# Altium PCB MCU103A.PcbDoc (part 4 of 6)
Units mm, origin at the board's own origin, x right, y up, seen from the top; angles counter-clockwise.
Board outline 58.42 x 139.7 mm, 4 copper layers (Top Signal, GND, PWR, Bottom Signal), stack 1.565 mm thick; 256 components, 210 nets, 1058 pads, 772 vias.
Unrouted connection lines stored in the file: 237.
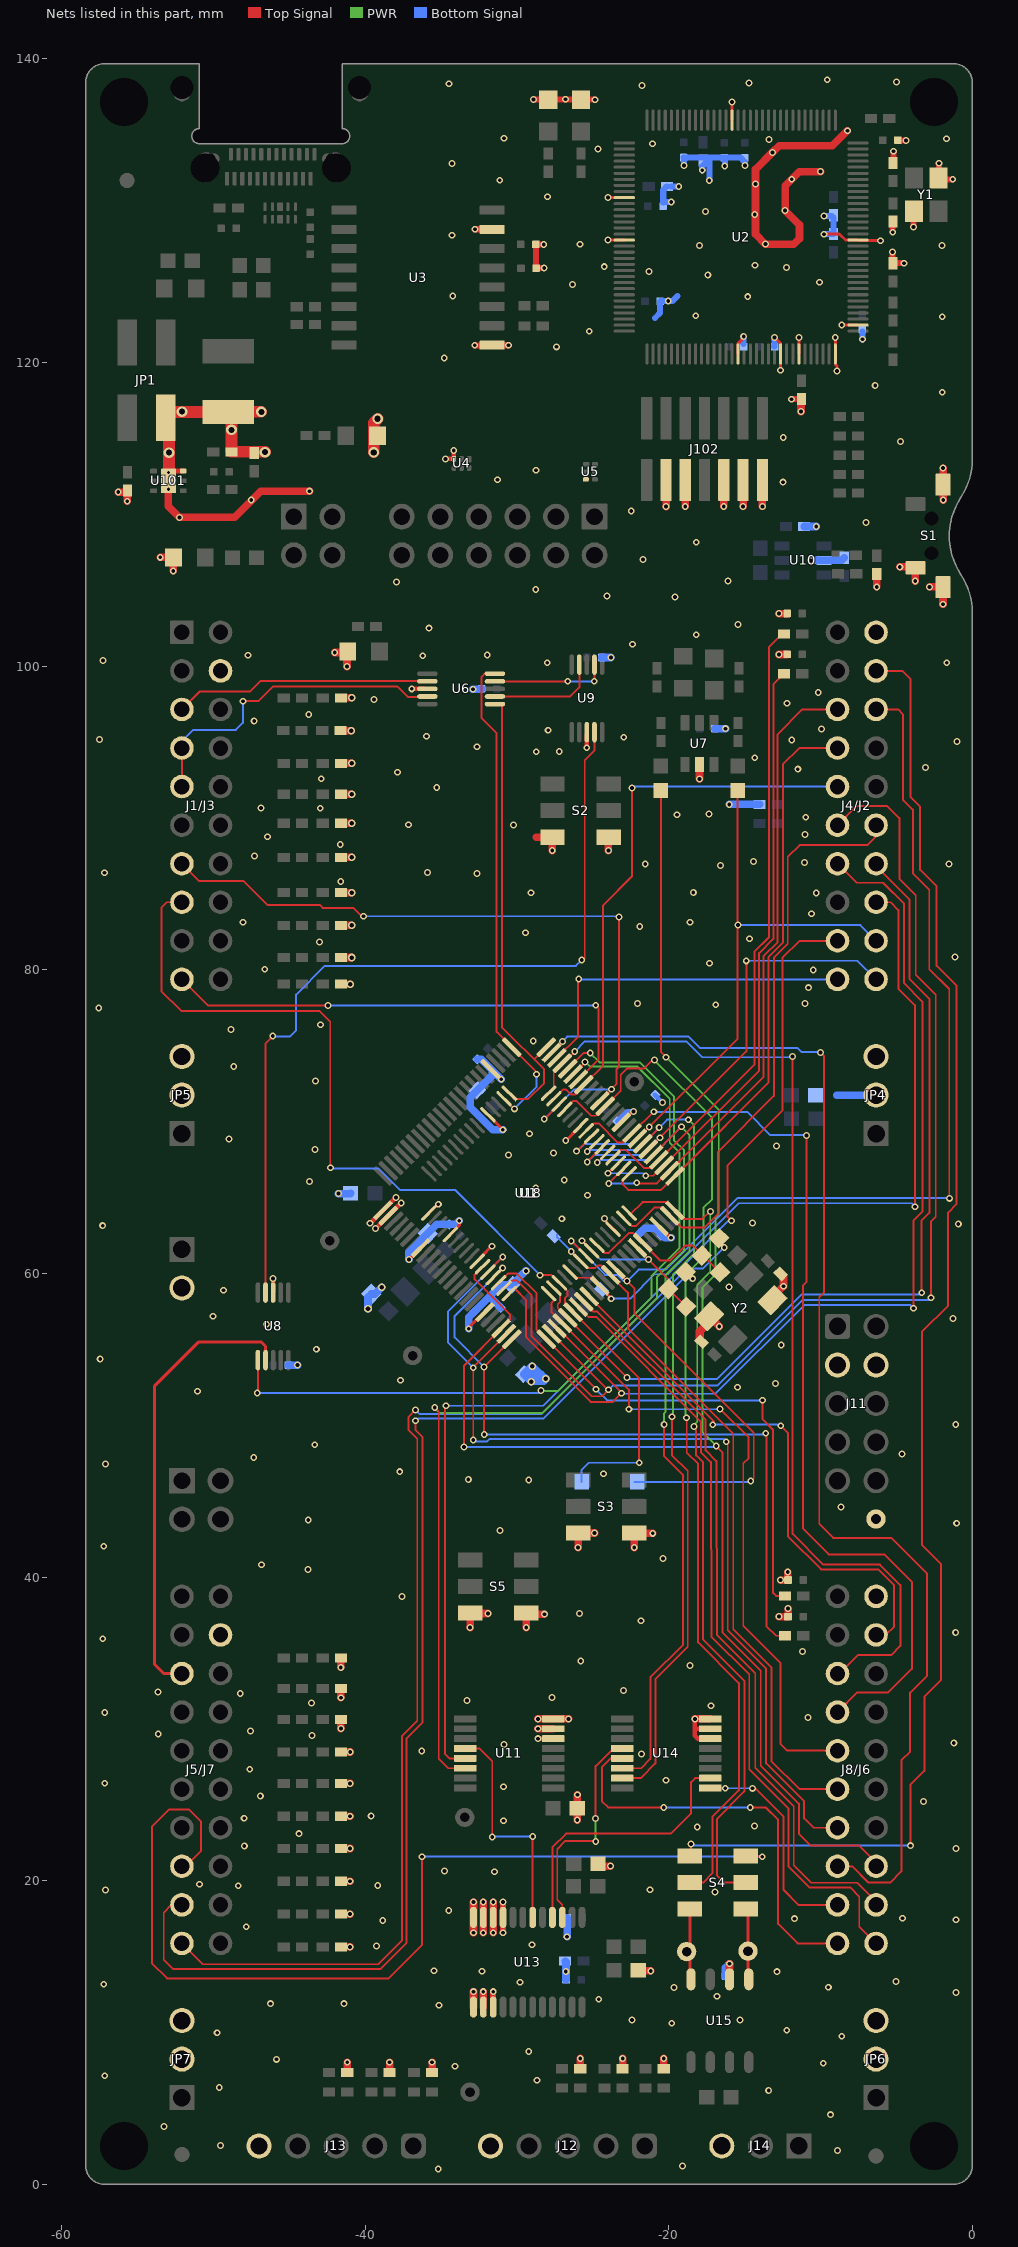
[diagram p5: the nets of this part, all layers, seen from the top]

## Via types
v1: diameter 0.45, hole 0.25, Top Signal to Bottom Signal, tented both sides, 726 vias
v2: diameter 0.5, hole 0.3, Top Signal to Bottom Signal, tented both sides, 22 vias
v3: diameter 0.7, hole 0.4, Top Signal to Bottom Signal, tented both sides, 17 vias
v4: diameter 0.4, hole 0.2, Top Signal to Bottom Signal, tented both sides, 5 vias
v5: diameter 0.5, hole 0.2, Top Signal to Bottom Signal, 2 vias

## Nets (pads, with @x,y where several pads share a name; then routed paths per layer and width w, separated by ;. In a path a pad name is that pad's centre, name@x,y a point inside that pad or via, vN(x,y) a via of type N, cw(c..) or ccw(c..) an arc to the next point about the centre after c; other vN are vias at no path point) (continued)
GND: C1.1 C2.1 C6.1 C7.2 C8.2 C9.1 C10.1 C11.1 C12.1 C13.1 C14.1 C15.2 C16.2 C17.1 C18.1 C19.1 C20.1 C21.1 C22.1 C23.1 C24.2 C25.2 C26.2 C27.2 C28.2 C29.2 C30.2 C31.2 C32.2 C33.2 C34.2 C35.2 C36.2 C37.2 C38.2 C39.2 C40.2 C41.2 C42.2 C43.2 C44.1 C45.2 C46.1 C50.1 C51.1 C52.1 C53.1 C54.1 C55.1 C56.2 C57.2 C58.1 C59.2 C60.1 C61.2 C62.2 C63.2 C64.2 C65.1 C66.1 C67.2 C68.2 C69.2 C70.2 C71.2 C72.2 C73.2 C74.2 C75.2 C76.2 C77.2 C78.2 C81.1 C82.1 C83.1 C84.1 C100.2 C103.2 C104.1 J1/J3.22 J4/J2.20 J5/J7.62 J8/J6.60 J11.3 J11.4 J12.5 J13.5 J14.3 J15.2 J102.3 J102.5 J102.9 J102.11 J102.13 JP1.4 JP4.2 JP4.3 JP5.2 JP5.3 JP6.2 JP6.3 JP7.2 JP7.3 LED0.1 LED1.1 LED2.2 LED3.2 LED6.1 R41.2 R52.1 R53.2 R67.1 R68.1 R83.2 R102.1 S1.1 S1.2 S1.3 S2.3 S2.6 S3.1 S3.4 S5.1 S5.4 TP6.1 U1.5 U1.26 U1.27 U1.33 U1.45 U1.72 U1.86 U2.10 U2.17 U2.48 U2.55 U2.58 U2.64 U2.66 U2.80 U2.114 U3.9 U3.15 U4.3 U5.3 U6.3 U7.2 U8.3 U9.3 U10.2 U11.6 U11.7 U11.8 U13.9 U13.10 U13.11 U13.12 U13.13 U13.14 U13.15 U14.6 U14.7 U14.8 U15.2 U18.5 U18.17 U18.21 U18.26 U18.45 U18.58 U101.3 U101.7@-52.959,112.21 Y1.2 Y1.4 Y2.2 Y2.4 | length 241.4
  Top Signal w0.2: v1@-37.069,60.969 U1.33@-36.352,61.686 ; U18.17@-35.892,63.899 v1@-35.175,64.616 ; U18.21@-34.478,62.485 -34.478,62.494 -33.805,63.167 v1(-33.805,63.481) ; v1@-33.234,56.389 U1.45@-32.217,57.406 ; U18.26@-32.39,61.076 v1@-31.656,61.81 ; U1.5@-31.756,73.494 -31.059,72.797 v1(-31.037,72.797) ; U18.5@-31.74,70.296 -30.933,69.489 v1(-30.933,69.468) ; v1(-26.788,68.769) -26.764,68.769 U18.58@-25.996,69.537 ; v1@-24.365,63.632 U18.45@-23.456,62.723 ; v1(-24.011,128.07) U2.17@-22.935,128.07 ; v1(-24.011,130.87) U2.10@-22.935,130.87 ; U1.86@-22.77,70.298 -22.386,70.682 v1(-22.322,70.682) ; U1.72@-20.654,63.1 v1@-19.938,62.383 ; U2.114@-15.835,135.97 v1(-15.835,137.16) ; U2.48@-15.435,120.57 -15.435,121.28 -15.071,121.644 v1(-15.071,121.725) ; v1(-13.033,121.661) -13.033,121.656 -12.897,121.52 -12.89,121.52 -12.635,121.265 U2.55@-12.635,120.57 v1(-12.635,119.494) ; U2.58@-11.435,120.57 v1(-11.435,121.646) ; v1(-9.779,128.46) -8.751,128.46 -8.361,128.07 U2.80@-7.535,128.07 -7.505,128.04 -6.069,128.04 v1(-6.06,128.031) ; v1(-9.035,121.646) U2.64@-9.035,120.57 -9.035,119.896 -8.916,119.777 v1(-8.916,119.439) ; v1(-8.611,122.47) U2.66@-7.535,122.47
  Top Signal w0.3: U101.7@-52.959,112.21 -52.959,112.477 -52.92,112.516 -52.576,112.86 U101.3@-51.984,112.86 ; U8.3@-46.064,58.749 U8.3@-46.064,58.749 v1(-46.063,59.677) ; v1(-39.676,63.311) U1.26@-38.827,64.161 v1(-37.978,65.01) ; v1(-39.323,62.958) U1.27@-38.474,63.807 v1(-37.624,64.656) ; v1(-36.932,98.513) U6.3@-36.071,98.513 ; v1(-34.703,113.654) -34.164,113.654 U4.3@-34.153,113.665 ; U4.3@-34.164,113.676 v1(-34.164,114.215) ; v1(-28.625,29.365) U11.6@-27.612,29.365 ; v1(-25.401,94.631) U9.3@-25.401,95.492 ; v1(-18.278,30.665) -18.278,30.069 -18.224,30.015 ; U14.6@-17.265,29.365 -18.094,29.365 -18.28,29.551 -18.28,30.015 U14.7@-17.265,30.015
  Top Signal w0.4: v1(-32.78,121.14) U3.9@-32.276,121.14 ; v1(-32.76,128.784) U3.15@-31.608,128.784 ; U13.15@-31.568,11.687 v1(-31.568,12.7) ; U3.9@-31.056,121.144 v1(-30.552,121.144) ; v1(-30.918,16.575) U13.9@-30.918,17.588 ; U13.9@-30.918,17.588 v1(-30.918,18.6) ; v1(-28.908,137.322) LED3.2@-28.404,137.322 ; C1.1@-28.754,127.646 -28.754,126.241 C2.1@-28.735,126.222 ; C1.1@-28.754,127.773 v1(-28.237,127.773) ; C2.1@-28.715,126.24 v1(-28.211,126.24) ; LED3.2@-27.691,137.344 LED2.2@-26.3,137.344 ; LED2.2@-25.359,137.317 v1(-24.855,137.317) ; v1(-11.924,117.59) R68.1@-11.42,117.59 ; R67.1@-5.266,126.78 v1(-5.266,127.284) ; v1(-5.256,128.59) C63.2@-5.256,129.094 ; C62.2@-5.206,133.415 v1(-5.206,133.919) ; R67.1@-5.012,126.549 v1(-4.508,126.549) ; C50.1@-4.888,134.626 v1(-4.384,134.626) ; v1(-3.877,128.937) Y1.4@-3.877,129.441 ; Y1.2@-2.213,132.633 v1(-2.213,133.137) ; Y1.2@-1.803,132.074 v1(-1.299,132.074)
  Top Signal w0.5: v1(-56.27,111.47) -55.674,111.47 v1(-55.674,110.874) ; v1(-53.503,107.174) LED6.1@-52.642,107.174 ; U101.7@-52.959,112.21 -52.959,110.53 v1(-52.232,109.803) -48.604,109.803 -46.873,111.534 -46.872,111.533 v1(-43.668,111.533) ; v1(-52.642,106.279) LED6.1@-52.642,107.14 ; v1(-42.006,100.908) LED1.1@-41.213,100.908 ; C39.2@-41.632,95.758 v2(-40.927,95.758) ; C25.2@-41.603,15.653 C25.2@-41.599,15.649 v1(-40.992,15.649) ; C38.2@-41.603,17.815 C38.2@-41.599,17.811 v1(-40.992,17.811) ; C75.2@-41.603,19.974 C75.2@-41.599,19.97 v1(-40.992,19.97) ; C40.2@-41.603,22.133 C40.2@-41.599,22.129 v1(-40.992,22.129) ; C29.2@-41.603,24.261 C29.2@-41.599,24.257 v1(-40.992,24.257) ; C27.2@-41.603,26.42 C27.2@-41.599,26.416 ; v1(-41.603,34.06) -41.603,34.667 C78.2@-41.599,34.671 ; C35.2@-41.599,28.479 C35.2@-41.595,28.483 ; C35.2@-41.599,28.487 C35.2@-41.595,28.483 ; v1(-41.599,30.031) C37.2@-41.599,30.638 C37.2@-41.595,30.642 ; v1(-41.599,32.063) C77.2@-41.599,32.67 C77.2@-41.595,32.674 ; C36.2@-41.599,80.814 v2(-40.894,80.814) ; C76.2@-41.599,82.93 v2(-40.894,82.93) ; C30.2@-41.599,85.09 v2(-40.894,85.09) ; C32.2@-41.599,87.411 v2(-40.894,87.411) ; C31.2@-41.599,89.662 v2(-40.894,89.662) ; C34.2@-41.599,91.567 v2(-40.894,91.567) ; C26.2@-41.599,93.599 v2(-40.894,93.599) ; C28.2@-41.599,97.917 v2(-40.894,97.917) ; C27.2@-41.595,26.42 C27.2@-41.599,26.416 ; C33.2@-41.565,79.045 -41.561,79.049 v2(-40.979,79.049) ; v1(-41.197,99.982) -41.197,100.892 LED1.1@-41.213,100.908 ; C73.2@-41.183,7.366 v1(-41.183,8.045) ; LED1.1@-41.156,100.965 LED1.1@-41.213,100.908 ; v1(-40.992,26.416) C27.2@-41.599,26.416 ; v1(-40.988,28.483) C35.2@-41.595,28.483 ; C72.2@-38.389,7.366 v1(-38.389,8.045) ; C71.2@-35.595,7.366 v1(-35.595,8.045) ; v1(-33.087,36.68) S5.4@-33.087,37.633 ; U13.13@-32.868,11.687 v1(-32.868,12.7) ; v1(-32.868,16.575) U13.12@-32.868,17.588 ; U13.12@-32.868,17.588 v1(-32.868,18.6) ; S5.4@-32.868,37.606 v1(-31.915,37.606) ; U13.14@-32.218,11.687 v1(-32.218,12.7) ; U13.11@-32.218,17.588 v1(-32.218,18.6) ; U13.11@-32.218,17.588 v1(-32.218,16.575) ; v1(-31.568,16.575) U13.10@-31.568,17.588 ; U13.10@-31.568,17.588 v1(-31.568,18.6) ; v1(-29.387,36.68) S5.1@-29.387,37.633 ; S5.1@-29.146,37.565 v1(-28.193,37.565) ; -28.73,88.734 S2.3@-27.869,88.734 ; v1(-28.625,30.665) U11.8@-27.612,30.665 ; v1(-28.625,30.015) U11.7@-27.612,30.015 ; v1(-27.678,87.863) -27.678,88.724 S2.3@-27.661,88.741 ; U11.8@-27.612,30.665 v1(-26.6,30.665) ; v1(-26.029,24.009) -26.029,24.785 R41.2@-26.036,24.792 -26.023,24.805 v1(-26.023,25.672) ; v1(-25.973,41.949) S3.4@-25.973,42.902 ; S3.4@-25.84,42.909 v1(-24.887,42.909) ; C70.2@-25.835,7.62 v1(-25.835,8.299) ; R52.1@-24.665,21.114 -24.523,20.972 v1(-23.849,20.972) ; v1(-23.978,87.863) S2.6@-23.978,88.724 ; C69.2@-23.041,7.62 v1(-23.041,8.299) ; v1(-22.273,41.949) S3.1@-22.273,42.902 ; R53.2@-22.016,14.097 -21.986,14.127 -21.926,14.067 v1(-21.19,14.067) ; S3.1@-22.014,42.888 v1(-21.061,42.888) ; C68.2@-20.33,7.62 v1(-20.33,8.299) ; J102.3@-20.188,112.265 -20.182,112.259 v1(-20.182,110.521) ; v1(-18.918,110.527) J102.5@-18.918,112.265 ; v1(-18.278,30.665) U14.8@-17.265,30.665 ; v1(-17.982,92.58) U7.2@-17.982,93.533 ; C41.2@-17.845,55.508 -17.98,55.643 -17.98,56.181 Y2.4@-17.16,57.001 ; Y2.4@-17.348,57.189 Y2.4@-17.16,57.001 ; v1(-16.674,56.515) Y2.4@-17.16,57.001 ; v1(-16.378,110.527) J102.9@-16.378,112.265 ; U15.2@-16.005,13.512 v1(-16.005,14.543) ; v1(-15.108,110.527) J102.11@-15.108,112.265 ; v1(-13.838,110.527) J102.13@-13.838,112.265 ; Y2.2@-13.122,58.489 v1(-12.448,59.163) -12.448,59.794 C42.2@-12.634,59.98 ; v1(-12.751,100.772) C83.1@-12.209,100.772 ; v1(-12.751,103.466) C84.1@-12.209,103.466 ; v1(-12.744,37.405) C81.1@-12.148,37.405 -12.141,37.412 v1(-12.141,37.928) ; v1(-12.641,39.805) C82.1@-12.157,39.805 ; v1(-12.164,40.333) -12.164,39.812 C82.1@-12.157,39.805 ; C82.1@-12.148,39.814 C82.1@-12.157,39.805 ; v1(-11.293,116.772) R68.1@-11.293,117.633 ; v1(-10.01,132.58) -11.394,132.58 v1(-11.9,132.074) -12.34,131.634 v1(-12.34,130.018) -11.394,129.072 -11.394,128.166 -11.775,127.785 -13.615,127.785 v1(-13.64,127.81) -14.29,128.46 v1(-14.29,131.76) -14.29,132.726 v1(-13.176,133.84) -12.736,134.28 -9.225,134.28 v1(-8.235,135.27) ; v1(-6.305,105.227) C7.2@-6.305,106.081 ; v1(-4.784,106.546) S1.3@-3.923,106.546 ; v1(-3.765,105.607) S1.3@-3.765,106.468 ; v1(-2.826,105.227) S1.1@-1.965,105.227 ; v1(-1.943,104.084) S1.1@-1.943,104.945 ; S1.2@-1.935,112.193 v1(-1.935,113.054) ; v1(-1.925,110.95) S1.2@-1.925,111.811
  Top Signal w0.762: U101.7@-52.92,112.516 v3(-52.92,114.068) -52.92,116.156 JP1.4@-53.136,116.372 -52.763,116.745 C104.1@-49.022,116.745 ; v3(-46.838,116.752) -49.015,116.752 C104.1@-49.022,116.745 ; v3@-46.571,114.122 R102.1@-48.803,114.122 -48.803,116.526 C104.1@-49.022,116.745 ; v3(-39.438,114.089) -39.438,116.031 -39.174,116.294 v3(-39.184,116.304)
  Bottom Signal w0.2: v1@-26.775,68.756 v1@-26.775,68.758 ; v1@-22.405,70.598 v1(-22.322,70.682)
  Bottom Signal w0.3: C23.1@-23.398,70.02 -22.737,70.682 v1(-22.322,70.682) ; C13.1@-20.936,71.787 -20.417,71.267 v1(-20.417,71.257)
  Bottom Signal w0.4: -20.91,122.94 -20.571,123.279 C55.1@-20.571,124.031 ; C55.1@-20.546,124.056 v1(-20.042,124.056) -19.764,124.056 -19.44,124.38 ; -20.369,130.558 -20.369,131.366 C57.2@-20.127,131.608 ; -20.344,130.583 v1(-19.84,130.583) ; C57.2@-19.847,131.591 v1(-19.343,131.591) ; C52.1@-19.03,133.508 -15.291,133.508 ; v1(-19.005,132.979) C52.1@-19.005,133.483 ; v1(-17.797,132.669) -17.797,132.933 C61.2@-17.491,133.239 ; v1(-17.332,132.001) -17.332,133.434 -17.308,133.458 ; v1(-16.311,132.954) C60.1@-16.311,133.458 ; -15.266,133.483 -14.986,133.203 v1(-14.986,132.979) ; C54.1@-15.071,121.221 v1(-15.071,121.725) ; C53.1@-13.056,121.063 -13.033,121.086 v1(-13.033,121.661) ; v1(-9.779,128.46) C56.2@-9.275,128.46 ; v1(-9.779,129.661) -9.275,129.661 -9.164,129.55 C56.2@-9.164,128.467 ; v1(-7.251,121.537) C66.1@-7.251,122.041
  Bottom Signal w0.5: C45.2@-45.067,53.971 v1(-44.451,53.971) ; v1(-41.762,65.266) -40.972,65.266 C24.2@-40.96,65.278 ; v2(-39.816,57.672) -39.816,58.433 C16.2@-39.598,58.652 -39.376,58.652 v2(-38.921,59.107) ; v1(-37.111,60.932) -37.111,61.407 C15.2@-35.876,62.643 -35.272,63.246 -34.454,63.246 C14.1@-34.448,63.24 -34.046,63.24 v1(-33.805,63.481) ; v1(-33.177,56.363) -33.177,57.128 C10.1@-32.792,57.513 -31.832,58.473 ; v1(-32.908,98.486) -32.37,98.486 C43.2@-32.335,98.521 ; C11.1@-32.621,74.115 -32.355,74.115 v1(-31.037,72.797) ; C20.1@-31.548,73.229 -31.548,73.144 C9.1@-32.609,72.083 -33.081,71.61 -33.081,70.955 -31.594,69.468 v1(-30.933,69.468) ; C22.1@-31.08,57.744 -31.809,58.473 -31.832,58.473 ; v1(-29.41,60.176) C19.1@-30.328,59.259 -31.047,59.259 -31.832,58.473 ; v2(-28.11,53.061) -28.42,53.372 -28.473,53.372 ; v2@-28.09,53.073 -28.248,52.915 -29.038,52.915 v2(-29.073,52.88) -29.073,52.889 C18.1@-29.556,53.372 ; C67.2@-26.828,14.711 -26.77,14.653 C65.1@-26.77,13.475 ; v1(-26.699,16.317) C64.2@-26.699,17.564 ; C46.1@-24.406,100.577 v1(-23.818,100.577) ; C21.1@-21.957,62.626 -21.597,62.986 -20.885,62.986 -20.253,62.354 v1(-19.848,62.354) ; C44.1@-16.975,95.897 -16.968,95.89 v1(-16.261,95.89) ; C74.2@-16.264,13.724 -16.264,14.284 v1(-16.005,14.543) ; v1(-16.024,90.902) C17.1@-14.018,90.902 ; C8.2@-11.089,109.204 v1(-10.286,109.204) ; v1(-10.662,106.97) U10.2@-9.787,106.97 -8.62,106.97 C6.1@-8.446,107.144 ; -8.952,71.755 JP4.2@-6.35,71.755 ; C18.1@-29.556,53.372 -28.473,53.372 ; C18.1@-29.556,53.372 -29.028,53.899 v2(-29,53.899) -28.473,53.372
  other v1: -35.182,1.022 -19.095,1.21 -8.89,2.234 -49.53,2.572 -53.243,3.821 -9.347,4.599 -13.424,6.193 -49.611,6.393 -28.681,6.861 -57.15,7.163 -34.089,7.786 -9.831,7.983 -45.836,8.242 -29.221,8.766 -8.61,9.758 -49.75,9.994 -12.236,10.154 -19.802,10.614 -22.421,10.84 -15.32,10.84 -35.134,11.8 -46.246,11.91 -41.402,11.91 -24.612,12.2 -16.831,12.402 -1.075,12.651 -19.651,12.981 -9.493,12.988 -57.219,13.183 -29.804,13.325 -5.033,13.366 -12.874,14.017 -32.314,14.043 -26.783,14.036 -35.467,14.076 -39.251,15.699 -29.008,15.795 -47.837,16.974 -38.839,17.386 -1.092,17.432 -11.719,17.508 -4.603,17.54 -34.499,18.047 -16.96,19.255 -57.095,19.403 -21.244,19.412 -48.362,19.673 -39.17,19.702 -50.91,19.77 -31.479,20.6 -34.773,20.655 -1.09,22.134 -47.959,22.294 -44.361,23.107 -18.127,23.55 -14.357,23.613 -30.891,23.952 -47.971,24.124 -39.607,24.267 -3.221,25.22 -46.906,25.585 -30.891,26.196 -57.157,26.431 -20.178,26.627 -47.606,27.35 -21.794,28.35 -36.275,28.558 -30.847,28.984 -1.227,29.083 -43.507,29.567 -53.627,29.674 -47.55,29.87 -10.832,30.762 -57.157,31.095 -17.226,31.532 -43.536,31.708 -33.3,31.88 -27.688,32.078 -48.23,32.331 -53.655,32.446 -22.98,32.541 -18.615,34.191 -25.801,34.475 -11.203,35.114 -57.281,35.947 -1.107,36.349 -21.833,37.13 -25.878,37.613 -37.581,38.734 -43.768,40.514 -46.829,40.814 -20.384,41.235 -57.219,42.042 -31.116,43.066 -1.041,43.552 -43.752,43.773 -8.667,44.62 -29.229,46.404 -33.205,46.433 -24.303,46.814 -37.723,46.951 -57.095,47.453 -47.335,47.882 -4.641,48.108 -43.324,48.728 -1.099,50.058 -51.04,52.242 -15.486,52.511 -12.979,52.748 -37.67,52.972 -57.456,54.367 -43.217,55.01 -12.593,55.296 -46.503,56.656 -1.282,57.034 -50.018,57.187 -49.34,58.905 -16.028,59.115 -31.642,61.797 -57.292,63.154 -0.93,63.255 -14.482,63.329 -27.046,63.612 -24.236,63.628 -35.181,64.565 -25.358,65.158 -28.77,65.655 -43.665,66.069 -26.886,66.153 -30.565,67.806 -27.597,67.948 -43.308,68.176 -12.91,68.402 -48.971,68.863 -29.179,69.21 -43.271,72.687 -48.661,73.646 -28.93,75.326 -48.83,76.083 -42.948,76.39 -57.55,77.489 -16.912,77.704 -22.056,77.779 -11.039,77.784 -10.808,78.831 -10.485,79.991 -46.613,80.046 -17.314,80.441 -1.149,80.844 -43.013,81.837 -14.681,82.055 -29.448,82.45 -21.915,82.85 -48.056,83.134 -18.608,83.137 -10.611,83.701 -10.286,85.068 -29.084,85.079 -18.385,85.094 -41.604,85.813 -32.641,86.346 -57.175,86.397 -35.889,86.416 -16.596,86.886 -1.547,86.967 -21.555,86.985 -11.065,87.083 -14.419,87.144 -47.285,87.502 -41.646,88.263 -46.44,88.769 -11.032,88.927 -30.226,89.535 -37.147,89.56 -10.983,90.057 -19.469,90.224 -17.363,90.268 -42.956,90.649 -46.863,90.67 -35.289,92.022 -42.892,92.592 -37.88,93.018 -11.502,93.222 -3.091,93.339 -14.336,93.977 -28.737,94.37 -27.216,94.379 -32.641,94.694 -1.02,95.044 -11.904,95.135 -57.498,95.179 -22.965,95.323 -35.959,95.393 -27.948,95.78 -9.944,95.867 -47.313,96.401 -43.715,96.817 -12.211,97.567 -39.417,97.803 -10.156,98.275 -28.01,100.229 -1.697,100.235 -57.272,100.388 -36.208,100.691 -47.727,100.72 -31.965,100.749 -22.396,101.447 -18.194,102.077 -35.804,102.51 -15.44,102.743 -19.602,104.56 -24.063,104.631 -28.761,105.05 -37.942,105.556 -16.102,105.61 -21.693,107.037 -18.194,108.168 -7.007,109.473 -22.478,110.23 -47.505,110.943 -12.489,112.126 -31.287,112.287 -28.756,112.909 -4.748,114.798 -12.466,115.068 -1.993,118.043 -6.409,118.496 -34.792,120.3 -27.4,121.039 -25.24,122.07 -1.993,123.02 -18.23,123.092 -14.798,124.344 -34.236,124.394 -26.34,125.139 -10.07,125.29 -17.43,125.77 -21.3,126.01 -12.24,126.27 -24.25,126.32 -14.333,126.417 -17.97,127.72 -1.998,127.705 -25.851,127.793 -34.285,128.386 -14.34,129.759 -17.58,129.963 -27.991,130.929 -31.135,132.017 -34.285,133.109 -24.665,134.07 -21.067,134.412 -13.407,134.705 -1.718,134.742 -30.848,134.775 -26.804,137.344 -21.762,138.252 -34.48,138.367 -14.727,138.408 -5.006,138.489 -9.56,138.63
  other v3: -46.6,114.103 -48.802,115.567 -52.067,116.768
  other v5: -52.959,111.66 -52.959,112.76
GPIO0: R8.1 U1.79 U18.52 | length 41.4
  Top Signal w0.127: U18.52@-23.677,67.629 -23.154,68.152 -22.84,68.152 -21.633,66.945 -21.193,66.945 U1.79@-20.654,67.484 ; U1.79@-20.295,67.823 -19.877,68.241 -14.362,73.756 -14.362,81.187 -13.415,82.134 -13.415,101.254 R8.1@-12.589,102.08
GPIO1: R9.1 U1.78 U18.51 | length 40.7
  Top Signal w0.127: v1(-24.013,66.607) U18.51@-23.595,67.025 ; v1(-21.515,66.442) -21.014,66.442 U1.78@-20.027,67.429 ; U1.78@-20.24,67.183 -14.057,73.366 -14.057,81.1 -13.115,82.042 -13.115,98.807 R9.1@-12.412,99.51
  Bottom Signal w0.127: v1@-23.926,66.693 v1(-24.013,66.607) -21.68,66.607 v1(-21.515,66.442)
GPIO2: J4/J2.38 U1.77 U18.50 | length 41.2
  Top Signal w0.127: v1(-23.959,65.94) U18.50@-22.942,66.958 ; v1(-22.114,65.982) -22.069,65.937 -20.786,65.937 U1.77@-20.257,66.466 ; U1.77@-19.588,67.116 -19.225,67.479 -19.225,67.494 -19.21,67.494 -13.752,72.952 -13.752,80.923 -12.838,81.837 -12.838,95.518 -11.201,97.155 J4/J2.38@-8.89,97.155
  Bottom Signal w0.127: v1(-23.959,65.94) -22.156,65.94 v1(-22.114,65.982)
GPIO3: J4/J2.37 U1.76 U18.49 | length 39.1
  Top Signal w0.127: U18.49@-22.801,66.413 -23.042,66.172 -23.042,65.873 -22.685,65.516 -20.501,65.516 U1.76@-19.594,66.423 -18.971,67.046 -18.967,67.046 -13.448,72.566 -13.448,80.833 -12.484,81.797 -12.484,93.531 -11.4,94.615 J4/J2.37@-8.89,94.615 ; U18.49@-22.793,66.392 U18.49@-22.616,66.569 U18.49@-22.528,66.657
GPIO4: S4.2 U1.75 U18.48 | length 54.8
  Top Signal w0.127: U18.48@-22.528,63.899 -21.727,64.7 -20.133,64.7 U1.75@-19.594,64.161 -19.033,63.6 -17.788,63.6 -17.246,64.142 v1(-17.246,64.096) ; v1(-18.349,49.921) -18.349,49.834 -18.2,49.685 -18.2,48.028 -17.74,47.568 -17.74,35.893 -15.018,33.171 -15.018,25.896 -16.824,24.09 -16.824,20.345 -16.368,19.889 S4.2@-14.931,19.889
  PWR w0.127: v1(-18.349,49.921) -18.349,50.018 -18.13,50.237 -18.13,59.271 -17.27,60.131 -17.27,64.118 -17.246,64.142 v1(-17.246,64.096)
GPIO4_BP: J5/J7.48 S4.3 | length 65.7
  Top Signal w0.127: J5/J7.48@-52.652,20.955 J5/J7.48@-52.07,20.955 -51.832,20.955 -50.828,21.959 -50.828,23.915 -51.623,24.71 -52.9,24.71 -54.044,23.566 -54.044,14.57 -53.043,13.569 -38.463,13.569 -36.257,15.775 v1@-36.257,21.59 ; S4.3@-14.931,21.639 -14.882,21.59 v1(-13.849,21.59)
  Bottom Signal w0.127: v1(-36.263,21.59) v1(-13.849,21.59)
GPIO4_CANTX: S4.1 TP7.1 U15.1 | length 4.7
  Top Signal w0.2: U15.1@-14.793,13.512 -14.793,16.207 S4.1@-14.793,18.001
  Top Signal w0.5: S4.1@-14.931,18.139 S4.1@-14.793,18.001
GPIO5: S4.5 U1.89 U18.61 | length 68.5
  Top Signal w0.127: U18.61@-26.859,70.811 -26.293,71.377 -26.11,71.377 -25.125,70.392 -24.818,70.392 U1.89@-24.19,71.02 -23.165,72.045 -23.165,73.101 -22.747,73.519 -21.627,73.519 -21.105,74.041 -21.001,74.041 -20.982,74.06 v1(-20.947,74.06) ; v1@-18.773,50.48 -18.817,50.436 -18.817,48.211 -18.071,47.465 -18.071,35.701 -15.388,33.018 -15.388,25.957 -17.129,24.216 -17.129,20.499 -17.739,19.889 S4.5@-18.631,19.889
  PWR w0.127: v1(-20.947,74.06) -20.958,74.06 -17.148,70.249 -17.148,64.9 -17.718,64.329 -17.718,61.067 -18.907,59.878 -18.907,50.614 v1@-18.773,50.48
  other v1: -18.839,50.503
GPIO5_BP: J4/J2.19 S4.6 | length 98.2
  Top Signal w0.127: S4.6@-18.631,21.639 -18.544,21.726 v1(-18.544,22.425) ; J4/J2.19@-6.35,99.695 -4.621,99.695 -4.089,99.163 -4.089,91.401 -3.443,90.755 -3.443,86.581 -2.358,85.496 -2.358,80.26 -1.042,78.944 -1.042,64.583 -1.606,64.019 -1.606,57.891 -3.312,56.185 -3.312,42.112 -2.081,40.881 -2.081,33.21 -3.164,32.127 -3.164,27.245 -4.089,26.32 v1@-4.089,22.317
  Bottom Signal w0.127: v1@-18.554,22.459 -18.532,22.437 -18.412,22.317 v1(-4.083,22.317)
GPIO5_CANRX: S4.4 TP8.1 U15.4 | length 4.6
  Top Signal w0.2: U15.4@-18.603,13.512 S4.4@-18.603,18.111
  Top Signal w0.3: S4.4@-18.631,18.139 S4.4@-18.603,18.111
GPIO6: J8/J6.78 U1.97 U18.64 | length 67.4
  Top Signal w0.127: U18.64@-27.831,71.96 -27.578,72.213 -27.578,73.319 U1.97@-27.335,73.562 ; U1.97@-27.474,73.336 U1.97@-27.147,73.663 ; U1.97@-27.018,73.848 -26.975,73.848 v1(-26.201,74.622) ; v1@-11.847,74.268 -11.847,42.85 -9.827,40.83 -6.096,40.83 -4.743,39.477 -4.743,35.475 -5.348,34.87 -7.549,34.87 -8.764,33.655 J8/J6.78@-8.89,33.655
  Bottom Signal w0.127: v1(-26.201,74.622) -25.527,75.296 -18.857,75.296 -17.807,74.246 -11.944,74.246 v1@-11.797,74.393
  other v1: -11.853,74.304
GPIO7: J8/J6.77 U1.84 U18.57 | length 63.1
  Top Signal w0.127: U18.57@-25.444,69.397 -24.953,69.889 -24.627,69.889 -23.356,68.618 -23.056,68.618 U1.84@-22.422,69.252 ; U1.84@-22.362,69.304 v1@-21.001,70.666 ; v1(-10.938,69.085) -10.938,59.441 -11.161,59.218 -11.161,43.191 -9.472,41.502 -5.81,41.502 -3.995,39.687 -3.995,33.965 -5.568,32.392 -7.613,32.392 J8/J6.77@-8.89,31.115 J8/J6.77@-9.053,31.115
  Bottom Signal w0.127: v1(-20.987,70.652) -14.838,70.652 -13.309,69.123 v1@-11.064,69.123
GPIO8: J4/J2.15 U1.74 U18.47 | length 40.4
  Top Signal w0.127: U18.47@-22.969,63.634 -22.47,63.134 -22.153,63.134 -20.936,64.351 -20.491,64.351 U1.74@-19.947,63.807 -19.231,63.09 ; -19.257,63.117 -19.163,63.023 -17.66,63.023 -16.779,63.904 -16.779,67.999 -13.081,71.697 -13.081,80.808 -12.168,81.721 -12.168,87.446 -11.391,88.223 -6.918,88.223 -6.35,88.791 J4/J2.15@-6.35,89.535
GPIO9: J1/J3.7 U1.90 U18.62 | length 49.2
  Top Signal w0.127: J1/J3.7@-52.07,86.995 -50.927,85.852 -48.006,85.852 -46.44,84.286 -43.008,84.286 -42.803,84.081 -40.774,84.081 -40.229,83.536 v1(-40.119,83.536) ; v1(-28.202,70.183) -28.18,70.183 -27.185,71.178 U18.62@-27.185,71.2 ; U1.90@-24.184,71.712 -23.768,72.129 v1@-23.766,72.13 ; v1(-23.777,72.138) -23.777,72.174 -23.443,72.508 -23.443,73.002 -23.444,73.003 -23.444,73.462 -23.276,73.631 -23.276,83.343 v1@-23.165,83.454
  Bottom Signal w0.127: v1(-40.119,83.536) -23.261,83.536 v1@-23.164,83.439 ; v1(-28.202,70.183) -28.168,70.183 -26.221,72.13 v1@-23.766,72.13
  other v1: -23.288,83.493
GPIO10: J4/J2.36 U1.93 U18.63 | length 36.6
  Top Signal w0.127: U18.63@-27.566,71.519 -26.971,72.113 -26.756,72.113 -26.449,71.806 -26.171,71.806 U1.93@-25.847,72.13 ; U1.93@-25.544,72.486 -24.332,73.698 -24.332,84.255 -22.435,86.152 v1(-22.435,91.974)
  Bottom Signal w0.127: v1(-22.435,91.974) -22.334,92.075 J4/J2.36@-8.89,92.075
GPIO11: J4/J2.35 U1.52 U18.31 | length 78.3
  Top Signal w0.127: U18.31@-30.758,59.102 -30.316,59.544 -30.01,59.544 -29.059,58.593 -29.059,55.895 -25.08,51.916 -24.397,51.916 v1@-24.005,52.308 ; U1.52@-27.726,56.029 v1@-24.005,52.308 ; v1(-23.969,52.344) v1@-24.005,52.308 ; J4/J2.35@-8.89,89.535 -7.639,90.786 -5.614,90.786 -4.82,89.992 -4.82,86.011 -3.735,84.926 -3.735,79.69 -2.419,78.374 -2.419,63.736 -2.737,63.418 v1(-2.737,58.404)
  Bottom Signal w0.127: v1(-23.969,52.344) -23.688,52.625 -16.826,52.625 -11.191,58.26 v1@-2.889,58.26
GPIO12: R49.1 U1.51 U18.30 | length 36.7
  Top Signal w0.127: U18.30@-31.296,59.303 -30.601,59.998 -30.002,59.998 -28.711,58.707 -28.711,56.291 -28.095,55.675 U1.51@-28.079,55.675 -24.79,52.386 -24.794,52.382 v1(-24.804,52.382) ; v1(-13.824,51.658) -13.824,50.404 -13.138,49.718 -13.138,38.968 -12.937,38.767 R49.1@-12.348,38.767 R49.1@-12.205,38.767
  Bottom Signal w0.127: v1(-24.804,52.382) -24.069,51.647 v1@-13.824,51.647
GPIO13: R50.1 U1.50 U18.29 | length 49.3
  Top Signal w0.127: v1@-32.168,53.849 U1.50@-30.342,55.675 ; v1(-32.166,53.847) -32.166,49.42 v1(-32.154,49.407) ; U18.29@-31.65,59.657 v1@-30.933,60.373 ; v1@-13.569,49.508 -13.569,36.784 -12.928,36.143 R50.1@-12.348,36.143
  Bottom Signal w0.127: v1(-32.154,49.407) -32.151,49.41 -13.764,49.41 v1@-13.761,49.407 ; v1@-32.149,53.838 -34.106,55.795 -34.106,57.203 v1(-30.945,60.365)
  other v1: -13.611,49.477
GPIO14: U1.96 U11.14 | length 66.1
  Top Signal w0.127: v1(-35.417,51.181) -35.153,50.917 -35.153,28.046 -34.522,27.415 U11.14@-33.412,27.415 ; U1.96@-26.665,73.494 -25.634,74.525 v1(-25.17,74.525)
  PWR w0.127: v1(-35.417,51.181) -35.417,51.138 -35.092,50.813 -28.334,50.813 -20.783,58.364 -20.783,59.761 -18.998,61.546 -18.998,68.105 -19.646,68.753 -19.646,71.647 -21.909,73.91 -24.555,73.91 v1(-25.17,74.525)
GPIO14_BP: J4/J2.32 U11.13 | length 71.3
  Top Signal w0.127: v1@-34.741,51.298 -34.741,28.346 -34.46,28.065 U11.13@-33.412,28.065 ; v1(-15.875,63.475) -16.129,63.729 -16.129,67.132 -12.506,70.755 -12.517,80.785 ; -12.518,80.786 -11.389,81.915 J4/J2.32@-8.89,81.915
  Bottom Signal w0.127: v1(-34.673,51.29) -28.276,51.29 -16.091,63.475 v1(-15.875,63.475)
GPIO14_Q2A: U11.12 U13.6 | length 15.1
  Top Signal w0.127: U11.12@-33.412,28.715 -32.453,28.715 -31.63,27.892 v1(-31.63,22.893) ; U13.6@-28.968,17.588 v1(-28.968,22.912)
  Bottom Signal w0.127: v1(-31.63,22.893) -31.611,22.912 v1(-28.968,22.912)
GPIO15: U1.95 U8.6 | length 52.8
  Top Signal w0.127: v1@-47.064,52.241 U8.6@-47.064,54.299 ; U1.95@-26.311,73.141 -25.52,73.932 v1(-25.515,73.932)
  PWR w0.127: v1(-28.418,52.29) -28.387,52.259 -27.319,52.259 -21.131,58.447 -21.131,59.844 -19.303,61.672 -19.303,67.979 -19.939,68.615 ; v1(-25.515,73.932) -25.475,73.932 -25.176,73.633 -22.063,73.633 -19.939,71.509 -19.939,68.615 ; -19.706,68.382 -19.939,68.615
  Bottom Signal w0.127: v1@-47.104,52.143 -28.565,52.143 v1(-28.418,52.29)
  other v1: -47.104,52.132
GPIO15_BP: J5/J7.43 U8.7 | length 29.9
  Top Signal w0.2: J5/J7.43@-52.07,33.655 -53.276,33.655 -53.869,34.248 -53.869,52.603 -50.994,55.478 -46.834,55.478 -46.564,55.208 U8.7@-46.564,54.299
GPIO15_SCIRX: U8.4 U9.4 | length 56.3
  Top Signal w0.127: U8.4@-46.564,58.749 -46.564,75.169 v1(-46.092,75.641) ; v1@-25.653,80.623 -25.536,80.74 -25.536,93.801 -24.897,94.44 U9.4@-24.897,95.66
  Bottom Signal w0.127: v1@-46.112,75.611 -44.965,75.611 -44.549,76.027 -44.549,78.366 -42.655,80.26 -26.12,80.26 v1(-25.73,80.65)
GPIO16: J8/J6.76 U1.54 U18.33 | length 43.9
  Top Signal w0.127: U18.33@-27.831,58.596 -27.546,58.311 -27.546,58.27 -27.726,58.09 -27.726,57.443 U1.54@-27.018,56.736 -22.633,52.351 v1(-22.633,51.063) ; v1(-16.638,51.07) -16.615,51.07 -16.609,51.076 -14.744,49.211 -14.744,47.85 -15.099,47.494 -15.099,36.809 -12.631,34.341 -12.631,28.995 -12.211,28.575 J8/J6.76@-8.89,28.575
  Bottom Signal w0.127: v1(-22.633,51.063) -16.596,51.063 -16.609,51.076 -16.615,51.07 v1(-16.638,51.07)
GPIO17: J4/J2.14 U1.55 U18.34 | length 58.6
  Top Signal w0.127: U18.34@-27.28,58.734 -27.168,58.622 -27.168,58.135 -27.314,57.989 -27.314,57.758 U1.55@-26.92,57.364 ; U1.55@-26.524,57.031 -26.524,56.923 v1@-22.913,53.313 ; J4/J2.14@-6.428,86.918 -4.16,84.65 -4.16,79.424 -2.838,78.102 -2.838,63.995 -3.358,63.475 -3.358,58.898 v1@-3.235,58.775
  Bottom Signal w0.127: v1@-22.81,53.205 -22.666,53.061 -16.821,53.061 -11.273,58.609 -3.469,58.609 v1(-3.338,58.74)
  other v1: -22.759,53.157
GPIO18_BP: J5/J7.49 R36.1 | length 79.3
  Top Signal w0.127: J5/J7.49@-52.07,18.415 -52.764,18.415 -53.266,17.913 -53.266,14.801 -52.644,14.179 -39,14.179 -37.283,15.896 -37.283,29.374 -36.236,30.421 -36.236,49.244 -36.676,49.684 v1(-36.676,50.3) ; R36.1@-18.899,60.109 -18.453,59.663 v1(-18.43,59.663)
  Bottom Signal w0.127: v1(-36.676,50.3) -36.511,50.465 -28.239,50.465 -19.041,59.663 v1(-18.43,59.663)
GPIO18_X2: R32.1 R36.2 U1.68 U18.41 | length 11
  Top Signal w0.127: v1@-25.709,62.151 U18.41@-24.993,61.434 ; U1.68@-22.132,61.736 v1@-21.415,61.019 ; v1(-21.335,60.918) -19.789,59.372 -19.789,58.742 R32.1@-18.86,57.813
  Bottom Signal w0.127: v1(-25.714,62.157) -24.475,60.918 v1(-21.335,60.918)
GPIO19_BP: J5/J7.50 R37.1 | length 77.3
  Top Signal w0.127: J5/J7.50@-52.07,15.875 -50.702,14.507 -39.134,14.507 -37.588,16.053 -37.588,29.531 -36.569,30.55 -36.569,49.106 -37.144,49.681 -37.144,50.568 v1(-36.695,51.017) ; R37.1@-16.692,62.327 -16.692,62.066 v1(-16.35,61.724)
  Bottom Signal w0.127: v1(-36.695,51.017) -36.42,50.742 -28.393,50.742 -18.814,60.321 -17.753,60.321 v1(-16.35,61.724)
GPIO19_X1: R33.1 R37.2 U1.69 U18.42 | length 10.7
  Top Signal w0.127: U18.42@-24.737,61.866 -24.233,61.362 -23.942,61.362 -22.638,62.666 -22.342,62.666 U1.69@-21.715,62.039 ; U1.69@-21.709,62.012 -20.556,60.859 ; -20.554,60.861 -19.904,60.861 -18.922,61.843 -18.394,61.843 R33.1@-16.631,60.081
GPIO20: J8/J6.53 R34.1 U1.48 U18.27 | length 110.4
  Top Signal w0.127: v1(-33.488,48.572) -33.488,53.943 U1.48@-31.049,56.382 -30.473,56.958 -30.473,57.303 -32.788,59.618 -32.788,59.932 U18.27@-32.269,60.452 ; R34.1@-20.522,91.822 -20.522,74.595 v1(-20.178,74.251) ; v1@-16.907,48.564 -16.814,48.564 -16.474,48.224 -16.474,36.368 -13.944,33.838 -13.944,27.593 -11.436,25.085 -11.436,23.095 -10.673,22.332 -7.495,22.332 -6.35,21.187 J8/J6.53@-6.35,20.955
  PWR w0.127: v1(-20.178,74.251) -20.157,74.251 -16.71,70.804 -16.71,63.919 -16.921,63.708 -16.921,59.944 -17.793,59.072 -17.793,49.576 -16.871,48.654 v1(-16.871,48.639)
  Bottom Signal w0.127: v1(-33.488,48.572) -16.938,48.572 v1(-16.871,48.639)
GPIO21: J8/J6.74 U1.49 U18.28 | length 65.1
  Top Signal w0.127: v1@-32.897,53.814 U1.49@-30.746,55.966 ; v1@-32.881,49.023 v1(-32.881,53.798) ; U18.28@-31.953,60.073 v1(-30.935,61.09) ; v1@-16.121,48.964 -16.121,36.51 -13.594,33.983 -13.594,27.738 -11.086,25.23 -11.086,24.114 -10.467,23.495 J8/J6.74@-8.89,23.495
  Bottom Signal w0.127: v1@-32.838,53.76 -32.878,53.801 -34.547,55.47 -34.547,57.478 v1(-30.935,61.09) ; v1@-32.829,49.098 v1(-32.886,49.041) -32.786,48.941 -31.961,48.941 -31.796,49.105 -16.392,49.105 v1@-16.221,48.934
  other v1: -16.221,48.925
GPIO22: J4/J2.12 R35.1 U1.83 U18.56 | length 41.6
  Top Signal w0.127: v1@-26.059,68.04 -25.063,69.036 U18.56@-25.063,69.079 ; U1.83@-21.709,69.238 v1(-21.291,69.656) -15.468,75.479 R35.1@-15.468,91.822
  Bottom Signal w0.127: v1@-26.083,68.01 -26.083,68.017 -25.575,68.524 -22.423,68.524 v1(-21.291,69.656) ; v1(-26.081,68.062) v1@-26.077,68.062 ; v1(-15.448,82.951) -15.446,82.953 -7.388,82.953 J4/J2.12@-6.35,81.915
GPIO23: J4/J2.11 U1.81 U18.54 | length 30.5
  Top Signal w0.127: v1(-25.374,67.355) -25.363,67.355 -24.356,68.361 U18.54@-24.356,68.372 ; U1.81@-21.002,68.53 v1(-20.584,68.948) -14.896,74.636 v1(-14.896,80.597)
  Bottom Signal w0.127: v1(-25.374,67.355) -25.363,67.355 -24.918,67.799 -21.733,67.799 v1(-20.584,68.948) ; v1(-14.896,80.597) -14.89,80.603 -7.578,80.603 J4/J2.11@-6.35,79.375
GPIO24: J1/J3.8 R38.1 U1.56 U18.35 | length 65.6
  Top Signal w0.127: J1/J3.8@-52.07,84.455 -53.067,84.455 -53.42,84.102 -53.42,78.606 -52.111,77.297 -43.026,77.297 -42.3,76.571 v1@-42.3,66.968 ; v1(-28.478,59.885) -28.461,59.902 -27.723,59.902 -26.676,58.855 -26.676,58.551 -26.85,58.377 -26.85,58.014 U1.56@-26.58,57.744 ; U1.56@-26.748,57.88 U1.56@-26.311,57.443 ; U1.56@-26.146,57.286 -21.961,53.101 v1@-21.961,47.708
  Bottom Signal w0.127: v1(-42.291,66.968) -42.252,66.929 -39.135,66.929 -37.718,65.512 -34.084,65.512 -28.467,59.895 v1@-28.477,59.885 ; R38.1@-25.743,46.283 -25.743,47.076 -25.28,47.539 v1(-21.949,47.539)
GPIO25: J8/J6.51 U1.57 | length 51.9
  Top Signal w0.127: U1.57@-25.978,57.788 -25.933,57.788 -25.294,57.149 -24.787,57.149 -17.882,50.244 -17.882,48.229 -17.233,47.58 -17.203,36.09 -14.705,33.592 -14.705,27.352 -12.129,24.776 -12.129,20.962 -10.737,19.57 -8.062,19.57 -7.459,18.967 -7.459,16.984 J8/J6.51@-6.35,15.875
GPIO26: J8/J6.52 U1.58 | length 49.2
  Top Signal w0.127: U1.58@-25.254,57.863 -25.254,57.775 -24.976,57.497 -24.704,57.497 -17.577,50.37 -17.577,48.355 -16.864,47.642 -16.831,36.207 -14.31,33.686 -14.31,27.458 -11.773,24.921 -11.773,21.037 -10.611,19.875 -7.589,19.875 -6.35,18.636 J8/J6.52@-6.35,18.415
GPIO27: J8/J6.59 U1.59 | length 36.5
  Top Signal w0.127: U1.59@-25.271,58.495 -17.033,50.257 -17.111,50.179 v1(-17.111,50.043) ; v1(-12.63,49.979) -12.16,49.509 -12.16,42.704 -9.974,40.518 -6.215,40.518 -5.159,39.462 -5.159,36.743 -5.707,36.195 J8/J6.59@-6.35,36.195
  Bottom Signal w0.127: v1@-17.134,50.008 -17.111,50.031 v1(-17.111,50.043) -12.738,50.043 v1@-12.557,49.862
GPIO28: U1.1 U6.10 U18.2 | length 33.1
  Top Signal w0.127: -32.129,99.499 -32.342,99.286 -32.342,96.595 -31.347,95.6 -31.347,75.914 U1.1@-30.342,74.909 ; -32.129,99.509 U6.10@-31.453,99.509 ; U18.2@-30.607,71.247 v1@-30.189,70.829 ; U18.2@-30.603,71.247 -30.205,70.849 v1(-30.166,70.849) ; U1.1@-30.342,74.901 U1.1@-29.863,74.422 ; U1.1@-30.155,74.718 -28.711,73.274 v1(-28.711,73.131)
  Bottom Signal w0.127: v1(-30.166,70.849) -28.711,72.303 v1(-28.711,73.131)
GPIO28_BP: J1/J3.3 U6.2 | length 17.5
  Top Signal w0.127: J1/J3.3@-52.07,97.155 -50.88,98.345 -47.58,98.345 -46.905,99.02 U6.2@-35.31,99.02
GPIO28_SCIRX: U6.9 U9.7 | length 7.6
  Top Signal w0.127: U6.9@-31.453,99.009 v1(-26.661,99.009) ; v1(-24.907,99.011) -24.897,99.021 U9.7@-24.897,100.11
  Bottom Signal w0.127: v1(-26.661,99.009) -24.909,99.009 v1(-24.907,99.011)
GPIO29: U1.100 U6.6 U18.1 | length 30
  Top Signal w0.127: U6.6@-31.306,97.436 -31.07,97.436 -31.002,97.368 -31.002,76.227 -28.22,73.445 -28.22,72.548 -29.281,71.487 -30.173,71.487 U18.1@-30.27,71.584 ; -28.874,74.113 U1.100@-28.079,74.909
GPIO29_BP: J1/J3.4 J1/J3.5 U6.4 | length 22.4
  Top Signal w0.127: J1/J3.5@-52.07,92.075 J1/J3.4@-52.07,94.615 ; v1(-48.049,97.699) -47.045,97.699 -46.069,98.675 -37.894,98.675 -37.198,97.979 -35.454,97.979 U6.4@-35.356,98.078
  Bottom Signal w0.127: J1/J3.4@-52.07,94.615 -52.07,95.059 -51.325,95.804 -48.517,95.804 -48.049,96.272 v1(-48.049,97.699)
GPIO29_SCITX: U6.7 U9.9 | length 7.3
  Top Signal w0.127: U6.7@-31.453,98.009 -26.502,98.009 -25.897,98.614 U9.9@-25.897,100.11
GPIO30: J4/J2.31 U1.98 | length 22.6
  Top Signal w0.127: U1.98@-27.372,74.201 -25.97,75.603 -25.97,79.18
  Bottom Signal w0.127: v1(-25.938,79.403) -25.91,79.375 J4/J2.31@-8.89,79.375
GPIO31: J8/J6.73 U1.99 | length 83.7
  Top Signal w0.127: U1.99@-27.726,74.555 -27.007,75.274 v1(-27.007,75.291) ; v1(-10.019,74.569) -9.766,74.316 -9.766,58.776 -10.092,58.45 -10.092,43.505 -9.177,42.59 -5.352,42.59 -2.989,40.227 -2.989,33.518 -4.107,32.4 -4.107,28.514 -4.677,27.944 -4.677,20.62 -5.414,19.883 -6.848,19.883 -7.92,20.955 J8/J6.73@-8.89,20.955
  Bottom Signal w0.127: v1(-27.007,75.291) -26.697,75.601 -18.688,75.601 -17.949,74.862 -11.536,74.862 -11.271,74.597 v1@-9.914,74.597
GPIO32: J4/J2.18 R39.2 U1.64 U18.40 | length 90.3
  Top Signal w0.127: v1(-26.426,62.149) U18.40@-25.409,61.131 ; U1.64@-23.546,60.322 v1@-22.829,59.605 ; v1(-22.749,59.504) -22.27,59.024 -22.27,57.37 -14.407,49.507 -14.407,46.53 v1(-14.607,46.33) ; J4/J2.18@-6.35,97.155 -4.901,97.155 -4.576,96.83 -4.576,91.199 -3.93,90.553 -3.93,86.379 -2.845,85.294 -2.845,80.058 -1.529,78.742 -1.529,65.05 v1@-1.612,64.967
  Bottom Signal w0.127: v1(-26.426,62.149) -24.196,59.918 -23.399,59.918 -22.984,59.504 v1(-22.749,59.504) -21.995,60.258 -20.2,60.258 -15.469,64.989 v1@-1.595,64.989 ; R39.2@-22.277,46.283 R39.2@-22.067,46.283 v1@-14.443,46.283
  other v1: -1.514,64.953
GPIO33: J4/J2.34 U1.53 U18.32 | length 72.4
  Top Signal w0.127: U18.32@-30.132,58.986 -29.397,58.251 -29.397,55.802 -25.148,51.553 -23.687,51.553 v1(-23.123,52.117) ; U1.53@-27.372,56.382 -27.317,56.382 v1@-23.088,52.153 ; J4/J2.34@-8.89,86.995 -7.635,85.74 -5.881,85.74 ; -5.881,85.724 -4.502,84.346 -4.502,79.12 -3.295,77.913 -3.295,64.078 -3.885,63.488 v1@-3.885,57.716
  Bottom Signal w0.127: v1@-23.123,52.082 -16.938,52.082 -11.093,57.927 -4.091,57.927 v1(-3.88,57.716)
GPIO34: J1/J3.10 U1.94 | length 33.9
  Top Signal w0.127: J1/J3.10@-52.07,79.375 -50.341,77.646 v1(-42.449,77.646) ; U1.94@-25.598,73.127 -24.637,74.088 -24.637,77.506 v1(-24.808,77.676)
  Bottom Signal w0.127: -41.569,77.646 v1(-42.449,77.646) -24.838,77.646 v1(-24.808,77.676)
GPIO35: J8/J6.75 R44.1 U1.63 U18.39 | length 46.5
  Top Signal w0.127: v1@-26.416,61.444 U18.39@-25.7,60.727 ; U18.39@-25.798,60.805 -25.368,60.376 -24.851,60.376 -24.699,60.528 -24.447,60.528 U1.63@-23.836,59.918 ; U1.63@-23.856,59.909 -22.695,58.748 -22.695,56.392 -15.755,49.452 -15.755,48.732 -15.758,48.729 -15.758,36.578 -13.241,34.061 -13.241,27.891 -11.385,26.035 J8/J6.75@-8.89,26.035
  Bottom Signal w0.127: R44.1@-27.352,62.575 -27.352,62.383 v1(-26.426,61.457)
GPIO37: J4/J2.13 R45.1 U1.61 U18.37 | length 48.6
  Top Signal w0.127: U18.37@-26.426,60.046 -26.103,59.722 -25.068,59.722 -24.557,59.211 U1.61@-24.544,59.211 ; U1.61@-24.564,59.202 -24.564,59.167 -23.799,58.402 v1(-23.799,58.345) ; J4/J2.13@-6.35,84.455 -5.388,84.455 -4.876,83.943 -4.876,78.76 -3.792,77.676 v1@-3.792,64.573
  Bottom Signal w0.127: R45.1@-24.414,58.96 v1(-23.799,58.345) ; v1@-23.869,58.226 -23.799,58.296 v1(-23.799,58.345) ; v1(-3.782,64.397) -4.015,64.63 -15.397,64.63 -20.074,59.953 -20.946,59.953 -22.554,58.345 v1(-23.799,58.345)
GPIO40: U1.80 U14.14 U18.53 | length 55.7
  Top Signal w0.127: v1(-24.716,67.31) -24.716,67.317 U18.53@-24.302,67.732 ; U14.14@-23.065,27.415 -21.819,27.415 -21.208,28.026 -21.208,33.395 -19.06,35.543 -19.06,46.728 -20.307,47.975 v1(-20.307,50.049) ; U1.80@-20.947,67.89 -19.174,69.664 v1(-19.174,69.669)
  PWR w0.127: v1(-20.307,50.049) -20.307,50.797 -20.227,50.877 -20.227,59.871 -18.639,61.459 -18.639,69.134 v1(-19.174,69.669)
  Bottom Signal w0.127: v1(-24.716,67.31) -24.716,67.317 -24.561,67.472 -21.365,67.472 -19.174,69.664 v1(-19.174,69.669)
GPIO40_BP: J8/J6.71 U14.13 | length 27.2
  Top Signal w0.127: U14.13@-23.065,28.065 -23.826,28.065 -24.411,27.48 -24.411,25.244 -24.002,24.835 v1(-20.335,24.835) ; v1@-14.642,24.83 -13.613,24.83 -12.802,24.019 -12.802,17.157 -11.52,15.875 J8/J6.71@-8.89,15.875
  Bottom Signal w0.127: v1(-20.335,24.835) v1(-14.642,24.835)
GPIO40_Q1A: U13.3 U14.12 | length 14.6
  Top Signal w0.127: U13.3@-27.018,17.588 -27.018,18.423 -27.351,18.756 -27.351,22.085 -26.807,22.629 -24.944,22.629 v1@-24.821,22.752 ; v1(-24.821,24.113) -24.821,27.557 -23.663,28.715 U14.12@-23.065,28.715
  PWR w0.127: v1(-24.821,24.113) -24.821,22.61 v1(-24.81,22.599)
GPIO41: U1.82 U14.15 U18.55 | length 56.7
  Top Signal w0.127: v1@-25.379,68.031 -25.404,68.005 -25.404,68.043 U18.55@-25.009,68.439 ; U14.15@-23.065,26.765 -21.843,26.765 -20.879,27.729 -20.879,33.293 -18.755,35.417 -18.755,47.001 -19.793,48.039 v1(-19.793,50.566) ; U1.82@-21.655,68.597 v1(-20.637,69.615)
  PWR w0.127: v1@-19.719,50.566 -19.719,59.945 -18.334,61.33 -18.334,69.752 v1(-18.715,70.133)
  Bottom Signal w0.127: v1@-25.379,68.031 -25.404,68.005 -25.404,68.043 -25.321,68.126 -22.125,68.126 v1(-20.637,69.615) -20.117,70.135 -18.717,70.135 v1(-18.715,70.133)
  other v1: -25.378,68.031
GPIO41_BP: J8/J6.72 U14.1 | length 14.3
  Top Signal w0.127: U14.1@-17.265,26.115 -17.25,26.1 v1(-16.28,26.1) ; v1@-14.351,26.115 -12.442,24.206 -12.442,19.396 -11.461,18.415 J8/J6.72@-8.89,18.415
  Bottom Signal w0.127: v1(-16.28,26.1) -14.5,26.1 v1(-14.492,26.092)
GPIO41_Q1B: U13.4 U14.2 | length 18.1
  Top Signal w0.127: U13.4@-27.668,17.588 -27.668,22.199 -26.763,23.104 -19.889,23.104 -18.526,24.467 -18.526,26.506 -18.267,26.765 U14.2@-17.265,26.765